# Altium PCB RP2040_WEDS.PcbDoc
Units mm, origin at the board's own origin, x right, y up, seen from the top; angles counter-clockwise.
Board outline 55 x 66 mm, 2 copper layers (F.Cu, B.Cu); 69 components, 40 nets, 258 pads, 71 vias.
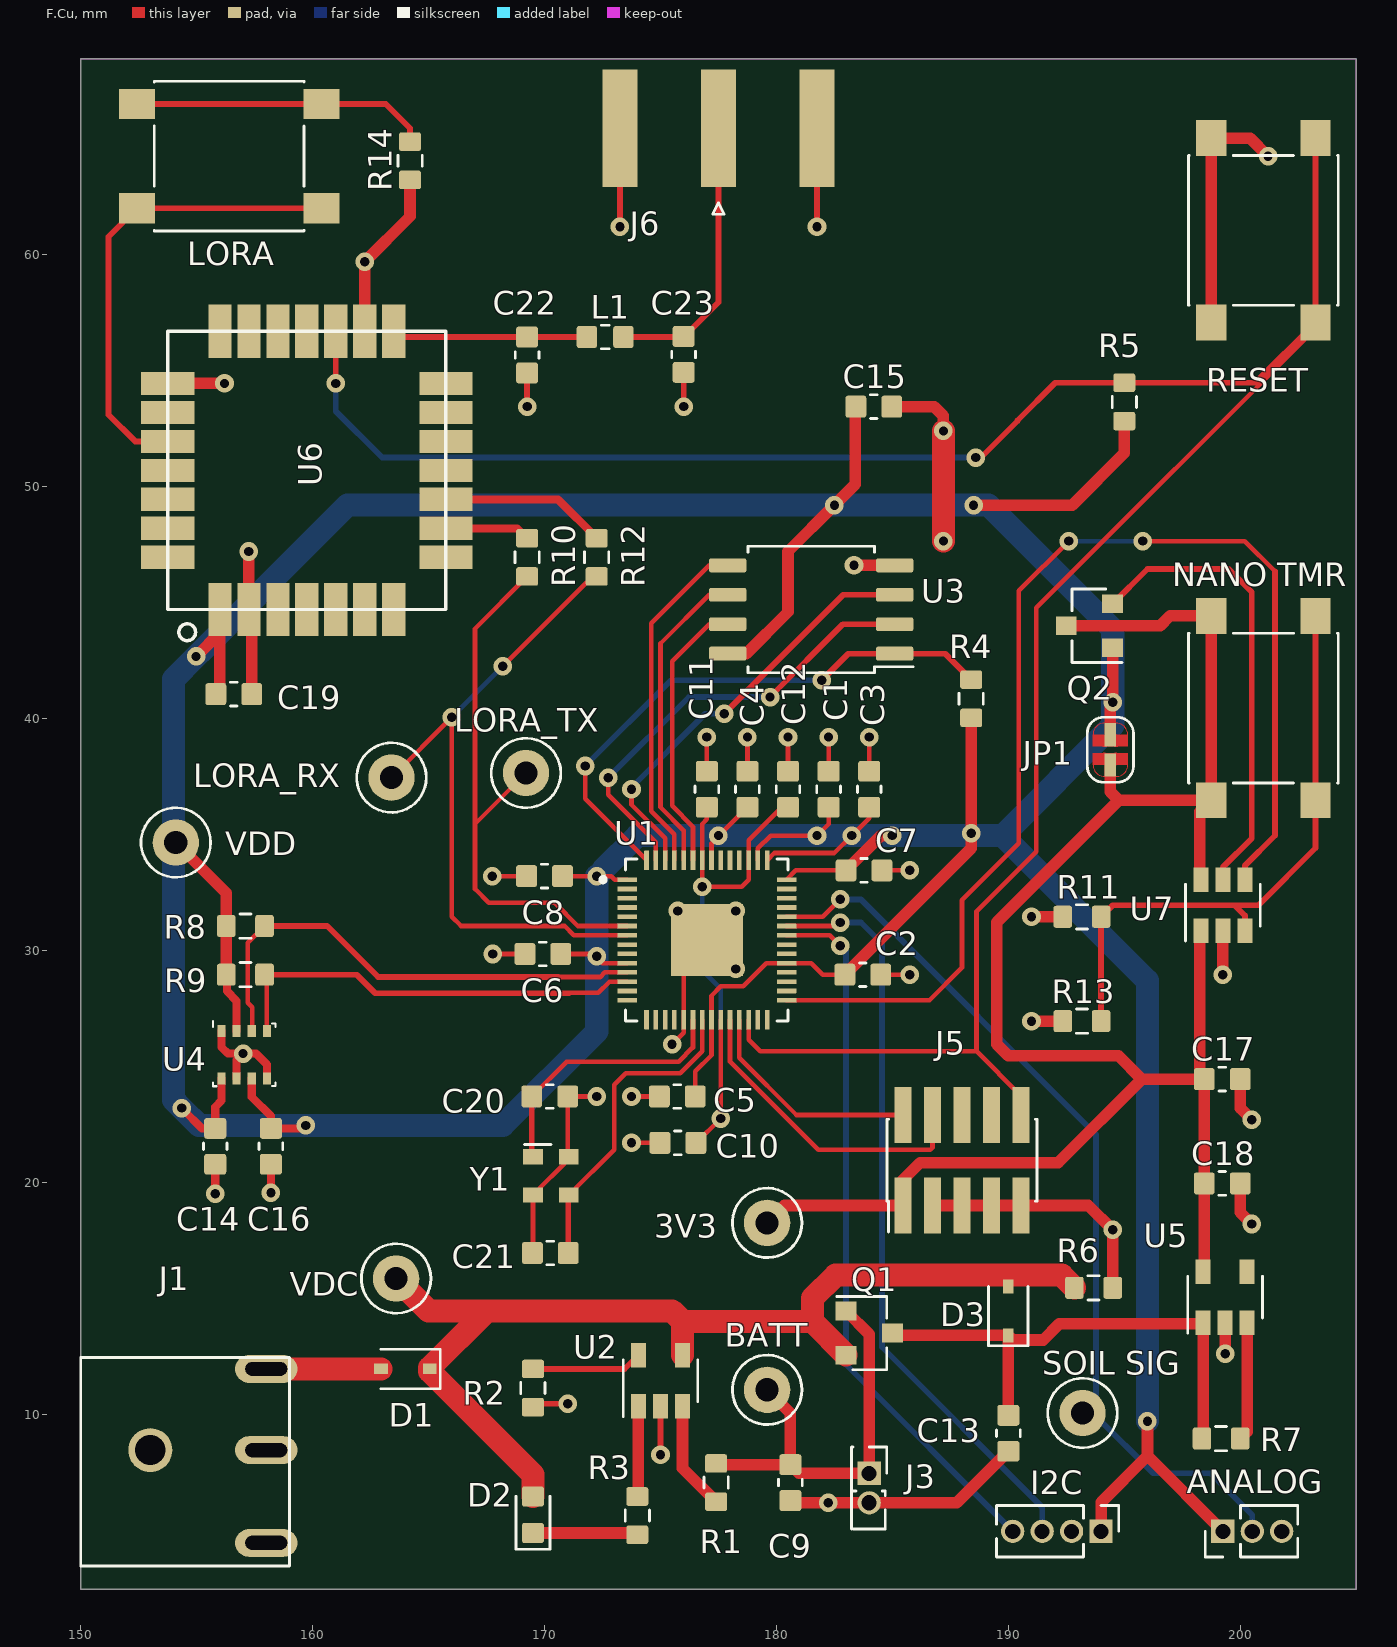
[diagram p0: F.Cu view]
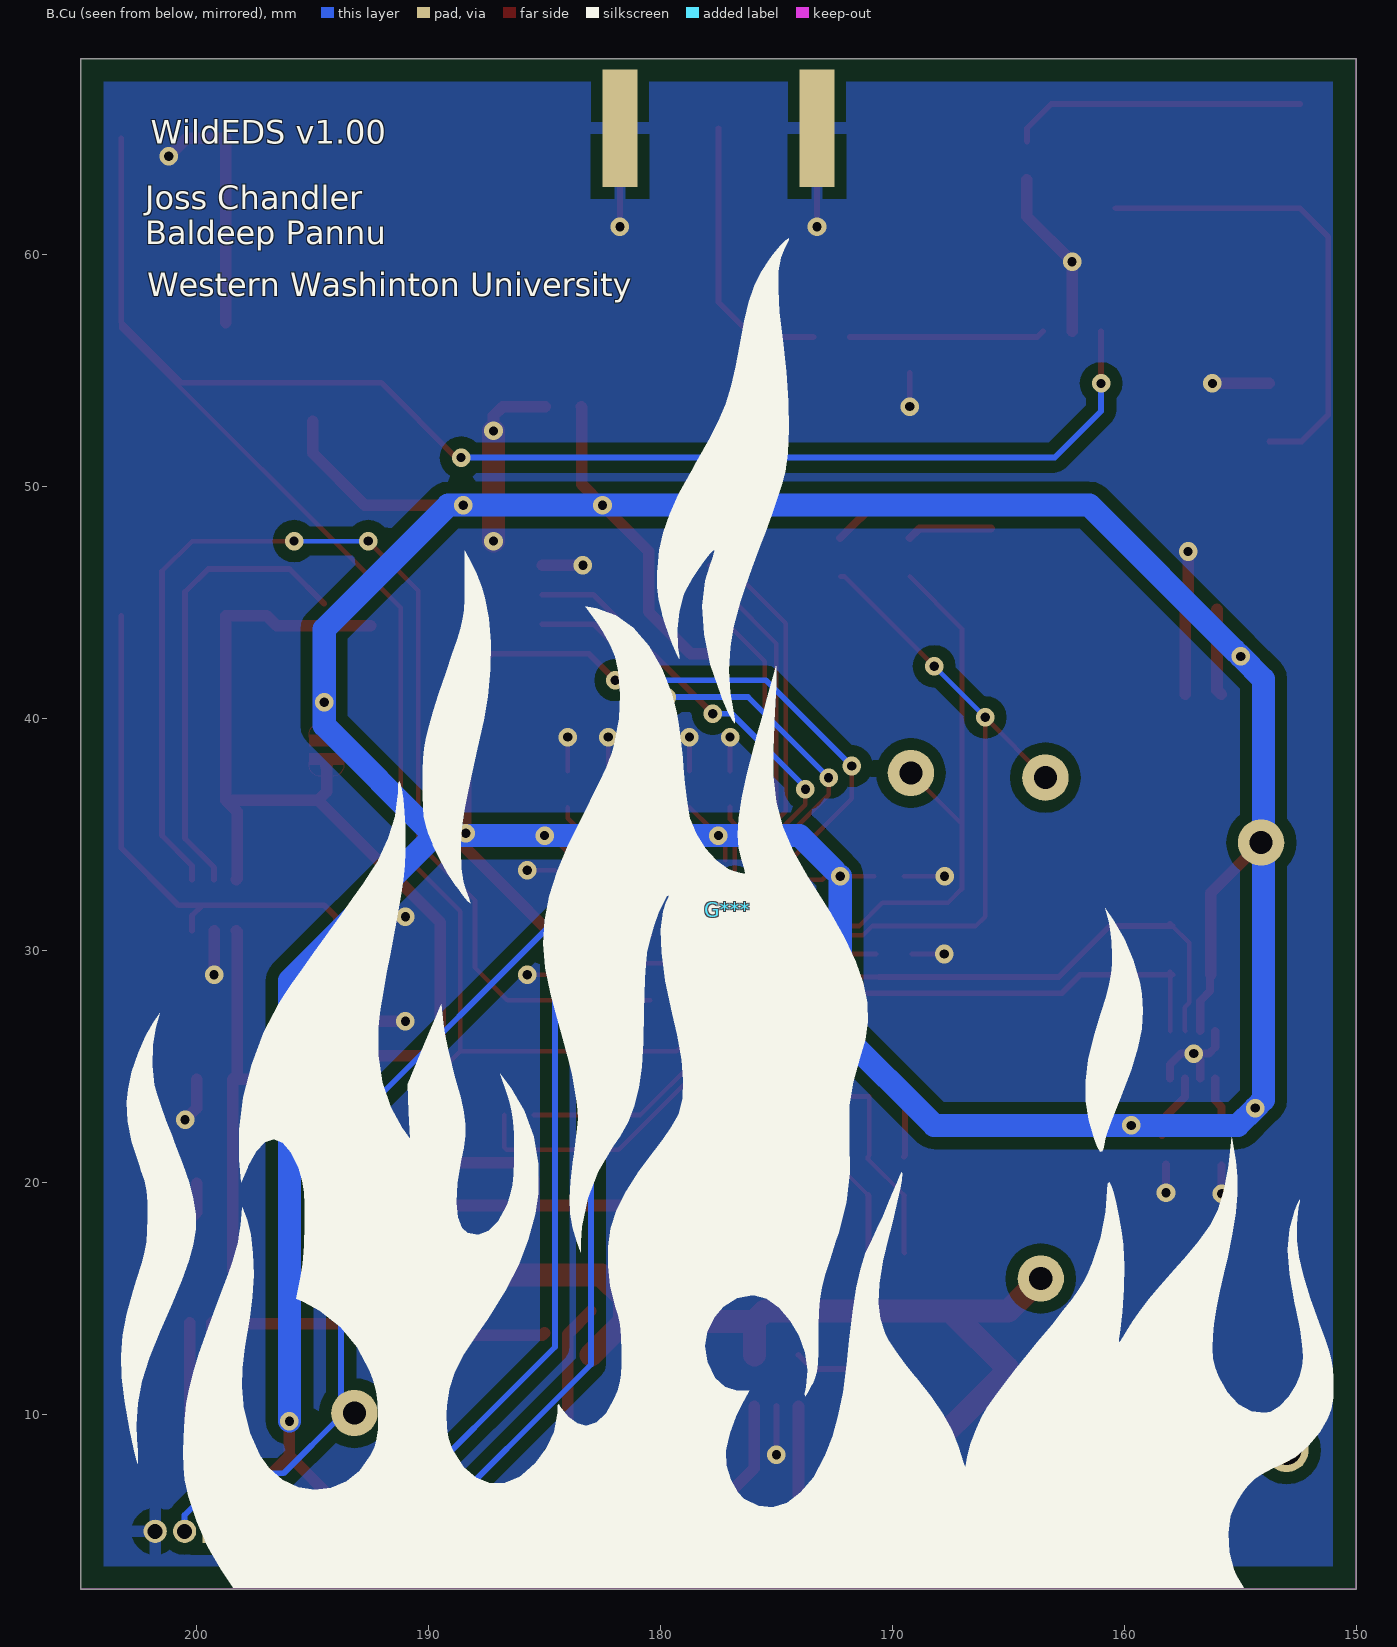
[diagram p1: B.Cu view, seen from below]

## Layer stack, top to bottom
F.Mask: solder mask 0.0102, Solder Resist, Dk 3.5
F.Cu: signal copper 0.0356
Dielectric 1: dielectric 0.32, FR-4, Dk 4.8
B.Cu: signal copper 0.0356
B.Mask: solder mask 0.0102, Solder Resist, Dk 3.5

## Board outline
205,68.45 205,2.45 150,2.45 150,68.45 205,68.45

## Design rules (kind name [scope] priority, off if disabled: settings)
Clearance "Clearence 0.508_Polygon" [InNamedPolygon('B.Cu-GND')] p1: gap=0.508 ignorepadtopadclearanceinfootprint=FALSE
Clearance "Clearence 0.2_NetClass" [InNetClass('Default')] p2: gap=0.2 ignorepadtopadclearanceinfootprint=FALSE
HoleSize "Hole Size (Default)" [All] p1: absolutevalues=TRUE maxlimit=10 minlimit=0.3 maxpercent=80.000 minpercent=20.000
MinimumSolderMaskSliver [All] p1: minsoldermaskwidth=0
PolygonConnect Polygon_B.Cu-GND_ConnectDirect [IsNamedPolygon('B.Cu-GND') vs IsVia] p1: connectstyle=Direct reliefconductorwidth=0.254 reliefentries=4 polygonreliefangle="90 Angle" airgapwidth=0.254
PolygonConnect Polygon_B.Cu-GND_ConnectRelief45 [IsNamedPolygon('B.Cu-GND') vs (IsThruPin or IsSMTPin) and (PadShape_AllLayers = 'Round')] p2: connectstyle=Relief reliefconductorwidth=0.508 reliefentries=4 polygonreliefangle="45 Angle" airgapwidth=0.508
PolygonConnect Polygon_B.Cu-GND_ConnectRelief90 [IsNamedPolygon('B.Cu-GND') vs (IsThruPin or IsSMTPin) and (PadShape_AllLayers <> 'Round')] p3: connectstyle=Relief reliefconductorwidth=0.508 reliefentries=4 polygonreliefangle="90 Angle" airgapwidth=0.508
RoutingVias [All] p1: holewidth=0.711 width=1.27 viastyle="Through Hole" minholewidth=0.711 minwidth=1.27 maxholewidth=0.711 maxwidth=1.27
SilkToSilkClearance [All] p1: silktosilkclearance=0
SilkToSolderMaskClearance [IsPad] p1: minsilkscreentomaskgap=0 clearancetoexposedcopper=TRUE
SolderMaskExpansion [All] p1: expansion=0.102 istentingtop=FALSE
Width [All] p1: maxlimit=10 minlimit=0.2 preferedwidth=0.25 minimp=50.000000 maximp=50.000000 favimp=50.000000
26 further rules are at their usual default settings.

## Classes and differential pairs
net class Default: +1V1 +3V3 +BATT DONE GND LORA_RX LORA_TX Net-(C13-Pad1) Net-(C22-Pad1) Net-(C23-Pad1) Net-(D1-Pad2) Net-(D2-Pad1) Net-(Q2-Pad2) Net-(R1-Pad2) Net-(R2-Pad2) Net-(R3-Pad2) Net-(R7-Pad1) Net-(R10-Pad1) Net-(R11-Pad2) Net-(R12-Pad1) Net-(R14-Pad2) Net-(SW3-Pad1) QSPI_CLK QSPI_CSN QSPI_SD0 QSPI_SD1 QSPI_SD2 QSPI_SD3 RESET SCL SCL_SOIL SDA SDA_SOIL SOIL_SIG SWD_CLK SWD_DIO VDC VDD XIN XOUT

## Components (designator, comment, footprint, x,y, rotation, side; value= is the part's Value field where it differs from the comment)
3V3 "TestPoint" TestPoint_Loop_D1.80mm_Drill1.0mm_Beaded 179.6,18.25 r0 top
ANALOG "Conn_01x03_Male" PinHeader_1x03_P1.27mm_Vertical 199.25,4.95 r90 top
BATT "TestPoint" TestPoint_Loop_D1.80mm_Drill1.0mm_Beaded 179.6,11.05 r0 top
C1 "1uF" C_0603_1608Metric 182.25,36.95 r90 top
C2 "100nF" C_0603_1608Metric 183.725,28.95 r0 top
C3 "100nF" C_0603_1608Metric 184,36.95 r90 top
C4 "100nF" C_0603_1608Metric 178.75,36.95 r90 top
C5 "100nF" C_0603_1608Metric 175.725,23.7 r180 top
C6 "100nF" C_0603_1608Metric 169.926,29.845 r180 top
C7 "100nF" C_0603_1608Metric 183.775,33.45 r0 top
C8 "100nF" C_0603_1608Metric 170,33.2 r180 top
C9 "10uF" C_0603_1608Metric 180.6,7.05 r270 top
C10 "100nF" C_0603_1608Metric 175.75,21.7 r180 top
C11 "100nF" C_0603_1608Metric 177,36.95 r90 top
C12 "1uF" C_0603_1608Metric 180.5,36.95 r90 top
C13 "10uF" C_0603_1608Metric 190,9.175 r270 top
C14 "100nF" C_0603_1608Metric 155.8,21.55 r270 top
C15 "C" C_0603_1608Metric 184.2,53.45 r0 top
C16 "100nF" C_0603_1608Metric 158.2,21.55 r270 top
C17 "10uF" C_0603_1608Metric 199.225,24.45 r0 top
C18 "10uF" C_0603_1608Metric 199.225,19.95 r0 top
C19 "4.7uF" C_0603_1608Metric 156.6,41.05 r0 top
C20 "8pF" C_0603_1608Metric 170.225,23.7 r0 top
C21 "8pF" C_0603_1608Metric 170.25,16.95 r0 top
C22 "DNP" C_0603_1608Metric 169.25,55.675 r270 top
C23 "DNP" C_0603_1608Metric 176,55.7 r270 top
D1 "D_Schottky" D_SOD-323 164,11.95 r180 top
D2 "LED" LED_0603_1608Metric 169.5,5.663 r90 top
D3 "D_Schottky" D_SOD-323 190,14.45 r90 top
G*** "LOGO" Flame_Logo 177.1,31.75 r0 bottom
I2C "Conn_01x04_Male" PinHeader_1x04_P1.27mm_Vertical 194,4.95 r270 top
J1 "Barrel_Jack_Switch_Pin3Ring" 54-00125 154,13.45 r0 top
J3 "LiPo Batt" PinHeader_2x01_P1.27mm_Vertical 184,7.45 r270 top
J5 "Conn_02x05_Odd_Even" PinHeader_2x05_P1.27mm_Vertical_SMD 188,20.95 r90 top
J6 "SMA-J-P-H-RA-TH1" SMA_Amphenol_132289_EdgeMount_new 177.5,65.45 r90 top
JP1 "SolderJumper_2_Open" SolderJumper-2_P1.3mm_Open_RoundedPad1.0x1.5mm 194.4,38.65 r90 top
L1 "0H" L_0603_1608Metric 172.612,56.45 r0 top
LORA "SW_Push" SW_Push_1P1T_NO_6x6mm_H9.5mm 156.4,64.25 r180 top
LORA_RX "TestPoint" TestPoint_Loop_D1.80mm_Drill1.0mm_Beaded 163.4,37.45 r0 top
LORA_TX "TestPoint" TestPoint_Loop_D1.80mm_Drill1.0mm_Beaded 169.2,37.65 r0 top
"NANO TMR" "SW_Push" SW_Push_1P1T_NO_6x6mm_H9.5mm 201,40.45 r270 top
Q1 "Q_PMOS_DGS" SOT-23 184,13.5 r0 top
Q2 "Q_PMOS_DGS" SOT-23 193.5,44 r180 top
R1 "0" R_0603_1608Metric 177.4,7.05 r270 top
R2 "2k" R_0603_1608Metric 169.5,11.125 r90 top
R3 "10k" R_0603_1608Metric 174,5.625 r90 top
R4 "10k" R_0603_1608Metric 188.4,40.85 r270 top
R5 "10k" R_0603_1608Metric 195,53.65 r90 top
R6 "10k" R_0603_1608Metric 193.675,15.45 r0 top
R7 "10k" R_0603_1608Metric 199.175,8.95 r180 top
R8 "10k" R_0603_1608Metric 157.1,31.05 r0 top
R9 "10k" R_0603_1608Metric 157.1,28.95 r0 top
R10 "22" R_0603_1608Metric 169.25,46.95 r270 top
R11 "221k" R_0603_1608Metric 193.175,31.45 r0 top
R12 "22" R_0603_1608Metric 172.25,46.95 r270 top
R13 "287k" R_0603_1608Metric 193.175,26.95 r0 top
R14 "470" R_0603_1608Metric 164.2,64.05 r90 top
RESET "SW_Push" SW_Push_1P1T_NO_6x6mm_H9.5mm 201,61.05 r270 top
"SOIL SIG" "TestPoint" TestPoint_Loop_D1.80mm_Drill1.0mm_Beaded 193.2,10.05 r0 top
U1 "RP2040" QFN40P700X700X90-57N 177,30.45 r0 top
U2 "MCP73831-2-OT" SOT-23-5 175,11.45 r90 top
U3 "W25Q128JVS" SOIC-8_5.23x5.23mm_P1.27mm 181.5,44.7 r180 top
U4 "BME280" Bosch_LGA-8_2.5x2.5mm_P0.65mm_ClockwisePinNumbering 157.05,25.5 r0 top
U5 "AP2112K-3.3" SOT-23-5 199.35,15.05 r90 top
U6 "LoRa-E5" LoRa-E5 159.75,50.7 r90 top
U7 "TPL5110" SOT-23-6 199.25,31.95 r90 top
VDC "TestPoint" TestPoint_Loop_D1.80mm_Drill1.0mm_Beaded 163.6,15.85 r0 top
VDD "TestPoint" TestPoint_Loop_D1.80mm_Drill1.0mm_Beaded 154.1,34.65 r0 top
Y1 "Crystal_GND24" Oscillator_SMD_Abracon_ASDMB-4Pin_2.5x2.0mm 170.275,20.275 r270 top

## Footprints (in the part's own frame and the unit in brackets; to place one, negate y for a bottom-side part, rotate by r counter-clockwise, add the part's x,y. Pads: shape width x height; smd on the part's side, far side on the other; paste and mask are expansions set on the pad)
54-00125 [mm]
  rrect100% 2.7x1.2 hole 0.6 slot 1.8 at 0 deg paste-2.7 mask+0.051: 1(4,-1.5) 2(4,-5) 3(4,-9)
  round 1.9 hole 1.3 paste-1.9 mask+0.051: Un1(-1,-5)
  silkscreen extent -4,-10 5,-1
Bosch_LGA-8_2.5x2.5mm_P0.65mm_ClockwisePinNumbering [mm]
  rect 0.35x0.5 smd mask+0.051: 1(-0.975,1.025) 2(-0.325,1.025) 3(0.325,1.025) 4(0.975,1.025) 5(0.975,-1.025) 6(0.325,-1.025) 7(-0.325,-1.025) 8(-0.975,-1.025)
  silkscreen extent -1.35,-1.36 1.35,1.45
C_0603_1608Metric [mm]
  rrect25% 0.9x0.95 smd mask+0.051: 1(-0.775,0) 2(0.775,0)
  silkscreen extent -0.14,-0.51 0.14,0.51
D_SOD-323 [mm]
  rect 0.6x0.45 smd mask+0.051: 1(-1.05,0) 2(1.05,0)
  silkscreen extent -1.5,-0.85 1.05,0.85
Flame_Logo [mm]
  silkscreen extent -26.12,-28.96 26.16,29.24
L_0603_1608Metric [mm]
  rrect25% 0.875x0.95 smd mask+0.051: 1(-0.787,0) 2(0.787,0)
  silkscreen extent -0.16,-0.51 0.16,0.51
LED_0603_1608Metric [mm]
  rrect25% 0.875x0.95 smd mask+0.051: 1(-0.787,0) 2(0.787,0)
  silkscreen extent -1.49,-0.73 0.8,0.73
LoRa-E5 [mm]
  rect 2.3x1 smd mask+0.051: 1(-6,3.75) 2(-6,2.5) 3(-6,1.25) 4(-6,0) 5(-6,-1.25) 6(-6,-2.5) 7(-6,-3.75) 15(6,-3.75) 16(6,-2.5) 17(6,-1.25) 18(6,0) 19(6,1.25) 20(6,2.5) 21(6,3.75)
  rect 1x2.3 smd mask+0.051: 8(-3.75,-6) 9(-2.5,-6) 10(-1.25,-6) 11(0,-6) 12(1.25,-6) 13(2.5,-6) 14(3.75,-6) 22(3.75,6) 23(2.5,6) 24(1.25,6) 25(0,6) 26(-1.25,6) 27(-2.5,6) 28(-3.75,6)
  silkscreen extent -7.34,-6 6,6
Oscillator_SMD_Abracon_ASDMB-4Pin_2.5x2.0mm [mm]
  rect 0.65x0.85 smd mask+0.051: 1(-0.825,-0.775) 2(0.825,-0.775) 3(0.825,0.775) 4(-0.825,0.775)
  silkscreen extent -1.35,-1.14 -1.35,0
PinHeader_1x03_P1.27mm_Vertical [mm]
  rect 1x1 hole 0.65 paste-1 mask+0.051: 1(0,0)
  rrect100% 1x1 hole 0.65 paste-1 mask+0.051: 2(0,-1.27) 3(0,-2.54)
  silkscreen extent -1.11,-3.23 1.11,0.76
PinHeader_1x04_P1.27mm_Vertical [mm]
  rect 1x1 hole 0.65 paste-1 mask+0.051: 1(0,0)
  rrect100% 1x1 hole 0.65 paste-1 mask+0.051: 2(0,-1.27) 3(0,-2.54) 4(0,-3.81)
  silkscreen extent -1.11,-4.5 1.11,0.76
PinHeader_2x01_P1.27mm_Vertical [mm]
  rect 1x1 hole 0.65 paste-1 mask+0.051: 1(0,0)
  rrect100% 1x1 hole 0.65 paste-1 mask+0.051: 2(1.27,0)
  silkscreen extent -1.13,-0.76 2.4,0.76
PinHeader_2x05_P1.27mm_Vertical_SMD [mm]
  rect 2.4x0.74 smd mask+0.051: 1(-1.95,2.54) 2(1.95,2.54) 3(-1.95,1.27) 4(1.95,1.27) 5(-1.95,0) 6(1.95,0) 7(-1.95,-1.27) 8(1.95,-1.27) 9(-1.95,-2.54) 10(1.95,-2.54)
  silkscreen extent -3.09,-3.23 1.77,3.23
QFN40P700X700X90-57N [mm]
  rrect3% 0.84x0.2 smd mask+0.051: 1(-3.435,2.6) 2(-3.435,2.2) 3(-3.435,1.8) 4(-3.435,1.4) 5(-3.435,1) 6(-3.435,0.6) 7(-3.435,0.2) 8(-3.435,-0.2) 9(-3.435,-0.6) 10(-3.435,-1) 11(-3.435,-1.4) 12(-3.435,-1.8) 13(-3.435,-2.2) 14(-3.435,-2.6) 29(3.435,-2.6) 30(3.435,-2.2) 31(3.435,-1.8) 32(3.435,-1.4) 33(3.435,-1) 34(3.435,-0.6) 35(3.435,-0.2) 36(3.435,0.2) 37(3.435,0.6) 38(3.435,1) 39(3.435,1.4) 40(3.435,1.8) 41(3.435,2.2) 42(3.435,2.6)
  rrect10% 0.2x0.84 smd mask+0.051: 15(-2.6,-3.435) 16(-2.2,-3.435) 17(-1.8,-3.435) 18(-1.4,-3.435) 19(-1,-3.435) 20(-0.6,-3.435) 21(-0.2,-3.435) 22(0.2,-3.435) 23(0.6,-3.435) 24(1,-3.435) 25(1.4,-3.435) 26(1.8,-3.435) 27(2.2,-3.435) 28(2.6,-3.435) 43(2.6,3.435) 44(2.2,3.435) 45(1.8,3.435) 46(1.4,3.435) 47(1,3.435) 48(0.6,3.435) 49(0.2,3.435) 50(-0.2,3.435) 51(-0.6,3.435) 52(-1,3.435) 53(-1.4,3.435) 54(-1.8,3.435) 55(-2.2,3.435) 56(-2.6,3.435)
  rect 3.1x3.1 smd paste-3.1 mask+0.051: 57(0,0)
  silkscreen extent -4.57,-3.5 3.5,3.5
R_0603_1608Metric [mm]
  rrect25% 0.8x0.95 smd mask+0.051: 1(-0.825,0) 2(0.825,0)
  silkscreen extent -0.24,-0.52 0.24,0.52
SMA_Amphenol_132289_EdgeMount_new [mm]
  rect 5.08x1.5 smd mask+0.051: 1(0,0) 2(0,-4.25) 3(0,4.25)
  rect 5.08x1.5 smd far side mask+0.051: 4(0,4.25) 5(0,-4.25)
  silkscreen extent -3.71,-0.25 -3.21,0.25
SOIC-8_5.23x5.23mm_P1.27mm [mm]
  rrect25% 1.6x0.6 smd mask+0.051: 1(-3.6,1.905) 2(-3.6,0.635) 3(-3.6,-0.635) 4(-3.6,-1.905) 5(3.6,-1.905) 6(3.6,-0.635) 7(3.6,0.635) 8(3.6,1.905)
  silkscreen extent -4.4,-2.73 2.73,2.73
SolderJumper-2_P1.3mm_Open_RoundedPad1.0x1.5mm [mm]
  rect 1x0.5 smd paste-1 mask+0.051: 1(-0.65,0) 2(0.65,0)
  F.Cu circle w0: c-0.65,0.25 r0.5
  F.Cu circle w0: c-0.65,-0.25 r0.5
  F.Cu region: -0.15,-0.75 -0.65,-0.75 -0.65,0.75 -0.15,0.75
  F.Cu region: 0.65,-0.75 0.15,-0.75 0.15,0.75 0.65,0.75
  F.Cu lines w0: 0.217,0 ccw(c0.65,-0.25) 0.65,-0.75 ccw(c0.65,-0.25) 1.083,0 ; 0.217,0 cw(c0.65,-0.25) 1.083,0 ; 0.217,0 ccw(c0.65,0.25) 0.65,-0.25 ccw(c0.65,0.25) 1.083,0 ; 0.217,0 cw(c0.65,0.25) 1.083,0
  silkscreen extent -1.4,-1 1.4,1
SOT-23 [mm]
  rect 0.9x0.8 smd mask+0.051: 1(-1,0.95) 2(-1,-0.95) 3(1,0)
  silkscreen extent -1.4,-1.58 0.76,1.58
SOT-23-5 [mm]
  rect 1.06x0.65 smd mask+0.051: 1(-1.1,0.95) 2(-1.1,0) 3(-1.1,-0.95) 4(1.1,-0.95) 5(1.1,0.95)
  silkscreen extent -1.55,-1.61 0.9,1.61
SOT-23-6 [mm]
  rect 1.06x0.65 smd mask+0.051: 1(-1.1,0.95) 2(-1.1,0) 3(-1.1,-0.95) 4(1.1,-0.95) 5(1.1,0) 6(1.1,0.95)
  silkscreen extent -1.55,-1.61 0.9,1.61
SW_Push_1P1T_NO_6x6mm_H9.5mm [mm]
  rect 1.55x1.3 smd mask+0.051: 1(-3.975,2.25) 1(3.975,2.25) 2(-3.975,-2.25) 2(3.975,-2.25)
  silkscreen extent -3.23,-3.23 3.23,3.23
TestPoint_Loop_D1.80mm_Drill1.0mm_Beaded [mm]
  round 2 hole 1 paste-2 mask+0.051: 1(0,0)
  silkscreen extent -1.5,-1.5 1.5,1.5

## Part data
3V3 BATT LORA_RX LORA_TX "SOIL SIG" VDC VDD: library part TestPoint_Loop_D1.80mm_Drill1.0mm_Beaded, "wire loop with bead as test point, loop diameter 1.8mm, hole diameter 1.0mm"
ANALOG: library part PinHeader_1x03_P1.27mm_Vertical, "Through hole straight pin header, 1x03, 1.27mm pitch, single row"
C1 C2 C3 C4 C5 C6 C7 C8 C9 C10 C11 C12 C13 C14 C15 C16 C17 C18 C19 C20 C21 C22 C23: library part C_0603_1608Metric, "Capacitor SMD 0603 (1608 Metric), square (rectangular) end terminal, IPC_7351 nominal, (Body size source: IPC-SM-782 page 76, https://www.pcb-3d.com/wordpress/wp-content/uploads/ipc-sm-782a_amendment_1_and_2.pdf), generated with kicad-footprint-generator"
D1 D3: library part D_SOD-323, "SOD-323"
D2: library part LED_0603_1608Metric, "LED SMD 0603 (1608 Metric), square (rectangular) end terminal, IPC_7351 nominal, (Body size source: http://www.tortai-tech.com/upload/download/2011102023233369053.pdf), generated with kicad-footprint-generator"
G***: library part Flame_Logo
I2C: library part PinHeader_1x04_P1.27mm_Vertical, "Through hole straight pin header, 1x04, 1.27mm pitch, single row"
J1: library part 54-00125
J3: library part PinHeader_2x01_P1.27mm_Vertical, "Through hole straight pin header, 2x01, 1.27mm pitch, double rows"
J5: library part PinHeader_2x05_P1.27mm_Vertical_SMD, "surface-mounted straight pin header, 2x05, 1.27mm pitch, double rows"
J6: library part SMA_Amphenol_132289_EdgeMount_new, "http://www.amphenolrf.com/132289.html"
JP1: library part SolderJumper-2_P1.3mm_Open_RoundedPad1.0x1.5mm, "SMD Solder Jumper, 1x1.5mm, rounded Pads, 0.3mm gap, open"
L1: library part L_0603_1608Metric, "Inductor SMD 0603 (1608 Metric), square (rectangular) end terminal, IPC_7351 nominal, (Body size source: http://www.tortai-tech.com/upload/download/2011102023233369053.pdf), generated with kicad-footprint-generator"
LORA "NANO TMR" RESET: library part SW_Push_1P1T_NO_6x6mm_H9.5mm, "tactile push button, 6x6mm e.g. PTS645xx series, height=9.5mm"
Q1 Q2: library part SOT-23, "SOT-23, Standard"
R1 R2 R3 R4 R5 R6 R7 R8 R9 R10 R11 R12 R13 R14: library part R_0603_1608Metric, "Resistor SMD 0603 (1608 Metric), square (rectangular) end terminal, IPC_7351 nominal, (Body size source: IPC-SM-782 page 72, https://www.pcb-3d.com/wordpress/wp-content/uploads/ipc-sm-782a_amendment_1_and_2.pdf), generated with kicad-footprint-generator"
U1: library part QFN40P700X700X90-57N
U2 U5: library part SOT-23-5, "5-pin SOT23 package"
U3: library part SOIC-8_5.23x5.23mm_P1.27mm, "SOIC, 8 Pin (http://www.winbond.com/resource-files/w25q32jv%20revg%2003272018%20plus.pdf#page=68), generated with kicad-footprint-generator ipc_gullwing_generator.py"
U4: library part Bosch_LGA-8_2.5x2.5mm_P0.65mm_ClockwisePinNumbering, "LGA-8"
U7: library part SOT-23-6, "6-pin SOT-23 package"
Y1: library part Oscillator_SMD_Abracon_ASDMB-4Pin_2.5x2.0mm, "Miniature Crystal Clock Oscillator Abracon ASDMB series, 2.5x2.0mm package, http://www.abracon.com/Oscillators/ASDMB.pdf"

## Via types
v1: diameter 0.8, hole 0.4, F.Cu to B.Cu, tented both sides, 71 vias

## Nets (pads, with @x,y where several pads share a name; then routed paths per layer and width w, separated by ;. In a path a pad name is that pad's centre, name@x,y a point inside that pad or via, vN(x,y) a via of type N, cw(c..) or ccw(c..) an arc to the next point about the centre after c; other vN are vias at no path point)
+1V1: C10.1 C11.1 C12.1 U1.23 U1.45 U1.50 | length 25.7
  F.Cu w0.2: C10.1@176.55,21.7 v1(177.6,22.75) U1.23 ; C11.1@177,36.2 177,35.65 176.8,35.45 U1.50 v1(176.8,32.75) 178.5,32.75 178.8,33.05 U1.45 178.8,34.75 180.225,36.175 C12.1
  B.Cu w0.2: v1(176.8,32.75) 176.8,32.65 176.8,32.55 176.8,29.15 177.6,28.35 v1(177.6,22.75)
+3V3: 3V3.1 "NANO TMR.2" C17.1 C18.1 J5.1 JP1.1 Q2.3 U5.5 U7.1 U7.6 | length 80.2
  F.Cu w0.5: 3V3.1 180.35,19 J5.1 185.46,20.11 186.2,20.85 192.15,20.85 195.75,24.45 ; Q2.3 196.55,44 196.975,44.425 198.75,44.425 198.75,36.475 ; JP1.1 194.4,36.842 194.767,36.475 ; U7.1 198.25,30.8 198.25,24.65 C17.1 ; U7.6 198.25,33.1 198.25,35.975 198.75,36.475 ; U5.5 198.45,16.2 C18.1 C17.1 ; 194.767,36.475 189.5,31.208 189.5,25.95 190,25.45 194.75,25.45 195.75,24.45 ; 194.767,36.475 198.75,36.475 ; 195.75,24.45 C17.1
+BATT: BATT.1 C9.1 J3.1 Q1.1 R1.1 | length 17.8
  F.Cu w0.5: R1.1 177.45,7.825 C9.1 ; BATT.1 180.6,10.05 C9.1 ; Q1.1 184,13.45 J3.1 180.975,7.45 C9.1
DONE: U1.29 U7.4 | length 51.7
  F.Cu w0.2: U1.29 186.6,27.85 188,29.25 188,32.164 190.45,34.614 190.45,38 190.45,45.5 v1(192.6,47.65) ; v1(195.8,47.65) 200.2,47.65 201.5,46.35
  F.Cu w0.25: U7.4 200.2,33.65 201.5,34.95 201.5,46.35
  B.Cu w0.2: v1(192.6,47.65) v1(195.8,47.65)
GND: ANALOG.3 C1.2 C2.2 C3.2 C4.2 C5.2 C6.2 C7.2 C8.2 C9.2 C10.2 C11.2 C12.2 C13.2 C14.2 C15.2 C16.2 C17.2 C18.2 C19.2 C20.2 C21.1 C22.2 C23.2 I2C.2 J1.2 J1.3 J3.2 J5.3 J5.5 J5.7 J5.9 J6.2 J6.3 J6.4 J6.5 R2.1 R6.2 R11.1 R13.1 R14.1 RESET.2 U1.19 U1.57 U2.2 U3.4 U4.1 U4.5 U4.7 U5.2 U6.2 U6.16 U6.22 U7.2 Y1.2 Y1.4 | length 118
  F.Cu w0.2: v1(167.767,29.845) C6.2 ; v1@168,33.2 C8.2 C8.2@169.5,33.2 ; C21.1 169.5,16.975 Y1.2 ; Y1.2@169.475,19.425 Y1.2 ; v1(172.25,23.7) C20.2 171,21.15 Y1.4 171.05,21 Y1.2 ; v1(173.75,21.7) C10.2 ; v1(173.75,23.7) C5.2 ; v1(175.5,25.95) 176,26.45 176,29.45 U1.57 ; C11.2 v1(177,39.2) ; C4.2 v1(178.75,39.2) ; C12.2 v1(180.5,39.2) ; C1.2 v1(182.25,39.2) ; C3.2 v1(184,39.2) ; C2.2 v1(185.75,28.95) ; C7.2 v1(185.75,33.45)
  F.Cu w0.25: v1(169.25,53.45) C22.2 ; R2.1 169.65,10.45 v1(171,10.45) ; v1(173.25,61.2) J6.3 ; v1@175,8.45 U2.2 ; v1(176,53.45) C23.2 ; v1(181.75,61.2) J6.2
  F.Cu w0.35: v1@155.8,19.75 C14.2@155.8,20.725 ; U4.1 156.075,25.825 156.35,25.55 v1(157,25.55) ; U4.7 156.725,25.275 v1(157,25.55) ; U4.5 158.025,25.075 157.55,25.55 v1(157,25.55) ; v1(158.2,19.55) C16.2
  F.Cu w0.5: U6.22 v1(156.2,54.45) ; v1(157.25,47.2) U6.2 157.375,44.575 C19.2 ; U6.16 v1(162.25,59.7) 164.2,61.65 R14.1 ; C9.2 180.695,6.18 v1(182.23,6.18) J3.2 187.78,6.18 C13.2 ; v1(183.345,46.605) U3.4 ; C15.2 186.8,53.45 187.2,53.05 v1(187.2,52.4) ; J5.3 J5.5 J5.7 J5.9 193.45,19 v1(194.5,17.95) R6.2 ; v1(191,26.95) R13.1 ; v1(191,31.45) R11.1 ; RESET.2@198.75,57.075 198.75,65.025 200.425,65.025 v1(201.2,64.25) ; v1(199.25,28.95) U7.2 ; v1(199.35,12.6) U5.2 ; C18.2 200,18.7 v1(200.5,18.2) ; C17.2 200,23.2 v1(200.5,22.7)
  F.Cu w1: v1(187.2,47.65) v1(187.2,52.4)
  other v1: 175,8.25 155.8,19.5 178.25,29.2 175.75,31.7 178.25,31.7 167.75,33.2
LORA_RX: LORA_RX.1 R12.2 U1.7 | length 29.1
  F.Cu w0.2: LORA_RX.1 v1(166,40.05) ; v1@166,40.25 v1(166,40.05) ; v1(168.2,42.25) 172.075,46.125 R12.2 ; U1.7 171.267,30.65 170.867,31.05 166.4,31.05 166,31.45 166,32.65 v1(166,40.05)
  B.Cu w0.2: v1(166,40.05) v1(168.2,42.25)
LORA_TX: LORA_TX.1 R10.2 U1.6 | length 25.3
  F.Cu w0.2: LORA_TX.1 167,35.45 167,34.85 ; R10.2 167,43.875 167,35.65 167,34.85 ; U1.6 171.433,31.05 170.433,32.05 167.6,32.05 167,32.65 167,34.85
Net-(C13-Pad1): C13.1 D3.1 Q1.3 R7.2 U5.1 | length 22.3
  F.Cu w0.5: Q1.3 185.1,13.4 D3.1 ; C13.1 D3.1 ; R7.2 198.4,9 U5.1 198.35,13.9 192.2,13.9 191.5,13.2 190.2,13.2 D3.1
Net-(C22-Pad1): C22.1 L1.1 U6.15 | length 8.4
  F.Cu w0.25: U6.15 163.75,56.45 L1.1
Net-(C23-Pad1): C23.1 J6.1 L1.2 | length 12.2
  F.Cu w0.25: L1.2 175.975,56.45 C23.1 176.025,56.475 177.5,57.95 J6.1
Net-(D1-Pad2): D1.2 J1.1 | length 5
  F.Cu w1: J1.1 D1.2
Net-(D2-Pad1): D2.1 R3.1 | length 4.5
  F.Cu w0.25: R3.1@173.925,4.875 R3.1
  F.Cu w0.5: D2.1 R3.1@173.925,4.875
Net-(Q2-Pad2): Q2.2 U7.5 | length 20
  F.Cu w0.25: Q2.2 196,46.45 199.5,46.45 200.5,45.45 200.5,34.83 199.25,33.58 U7.5
Net-(R1-Pad2): R1.2 U2.3 | length 4.7
  F.Cu w0.5: U2.3 175.95,7.675 R1.2
Net-(R2-Pad2): R2.2 U2.5 | length 4.8
  F.Cu w0.25: R2.2 173.45,11.95 U2.5
Net-(R3-Pad2): R3.2 U2.1 | length 3.9
  F.Cu w0.25: R3.2 R3.2@174.05,6.5
  F.Cu w0.5: R3.2@174.05,6.5 U2.1
Net-(R7-Pad1): R7.1 U5.3 | length 5.1
  F.Cu w0.5: R7.1 200.3,9.25 U5.3
Net-(R10-Pad1): R10.1 U6.9 | length 3.7
  F.Cu w0.35: U6.9 168.825,48.2 R10.1
Net-(R11-Pad2): "NANO TMR.1" R11.2 R13.2 U7.3 | length 26.7
  F.Cu w0.25: R13.2 194,30.95 R11.2 194.5,31.95 200.13,31.95 ; U7.3 200.2,31.5 199.75,31.95 200.13,31.95 ; 203.25,44.425 203.25,36.475 203.25,34.41 200.79,31.95 200.13,31.95
Net-(R12-Pad1): R12.1 U6.10 | length 7.2
  F.Cu w0.35: U6.10 170.575,49.45 R12.1
Net-(R14-Pad2): LORA.2 R14.2 | length 12.8
  F.Cu w0.25: LORA.2@152.425,66.5 160.375,66.5 163.15,66.5 164.2,65.45 R14.2
Net-(SW3-Pad1): LORA.1 U6.24 | length 20.4
  F.Cu w0.25: U6.24 152.35,51.95 151.2,53.1 151.2,60.775 152.425,62 LORA.1@160.375,62
QSPI_CLK: U1.52 U3.6 | length 13.5
  F.Cu w0.2: U1.52 176,35.167 175,36.167 175,43.235 177.1,45.335 U3.6
QSPI_CSN: R4.1 U1.56 U3.1 | length 24.3
  F.Cu w0.2: v1(171.75,37.95) 171.75,36.535 U1.56
  F.Cu w0.25: v1(181.95,41.65) 183.095,42.795 U3.1 187.28,42.795 R4.1
  B.Cu w0.25: v1(171.75,37.95) 175.45,41.65 v1(181.95,41.65)
QSPI_SD0: U1.53 U3.5 | length 15
  F.Cu w0.2: U1.53 175.6,35.001 174.6,36.001 174.6,44.105 177.1,46.605 U3.5
QSPI_SD1: U1.55 U3.2 | length 19.5
  F.Cu w0.2: v1(172.75,37.45) 172.75,36.72 174.8,34.67 U1.55
  F.Cu w0.25: v1(179.725,40.925) 182.865,44.065 U3.2
  B.Cu w0.25: v1(172.75,37.45) 176.225,40.925 179.475,40.925 v1(179.725,40.925)
QSPI_SD2: U1.54 U3.3 | length 18.5
  F.Cu w0.2: v1(173.75,36.95) 173.75,36.286 175.2,34.836 U1.54
  F.Cu w0.25: v1(177.75,40.2) 182.885,45.335 U3.3
  B.Cu w0.25: v1(173.75,36.95) 173.75,37.023 176.927,40.2 v1(177.75,40.2)
QSPI_SD3: U1.51 U3.7 | length 12
  F.Cu w0.2: U1.51 176.4,35.333 175.5,36.233 175.5,42.465 177.1,44.065 U3.7
RESET: J5.10 R5.2 RESET.1 U1.26 U6.17 | length 109.7
  F.Cu w0.2: U1.26 178.8,26.15 179.3,25.65 188.63,25.65 ; J5.10 190.54,23.74 188.63,25.65 ; RESET.1@203.25,57.075 203.25,56.819 191.2,44.769 191.2,34.25 188.63,31.68 188.63,25.65
  F.Cu w0.25: v1(161,54.45) U6.17 ; v1(188.6,51.25) 188.825,51.25 190.4,52.825 190.4,52.85 192.025,54.475 R5.2 200.65,54.475 203.25,57.075 RESET.1@203.25,65.025 ; J5.10 J5.10@190.54,23.73
  B.Cu w0.25: v1(161,54.45) 161,53.25 163,51.25 v1(188.6,51.25)
SCL: R9.2 U1.12 U4.4 | length 18.8
  F.Cu w0.2: R9.2 158.025,28.85 U4.4 ; 171.033,28.167 172.317,28.167 172.8,28.65 U1.12
  F.Cu w0.25: R9.2@158.025,29.05 R9.2 161.9,28.95 162.701,28.149 170.899,28.149 171.051,28.149
SCL_SOIL: I2C.3 U1.37 | length 32.8
  F.Cu w0.2: U1.37 182.6,31.05 v1(182.75,31.2)
  B.Cu w0.25: v1(182.75,31.2) 183.65,31.2 184.55,30.3 184.55,12.9 191.46,5.99 I2C.3
SDA: R8.2 U1.11 U4.3 | length 21.7
  F.Cu w0.2: U4.3 157.4,26.55 157.4,27.55 157.2,27.75 157.2,30.325 R8.2 ; 170.6,28.85 172.4,28.85 172.6,29.05 U1.11
  F.Cu w0.25: R8.2@158.025,31.15 R8.2 160.625,31.05 162.825,28.85 170.6,28.85
SDA_SOIL: I2C.4 U1.36 | length 30.8
  F.Cu w0.2: U1.36 182.3,30.65 v1(182.75,30.2)
  B.Cu w0.25: v1(182.75,30.2) 183,29.95 183,12.14 I2C.4
SOIL_SIG: "SOIL SIG.1" ANALOG.2 U1.38 | length 39.2
  F.Cu w0.2: U1.38 182,31.45 v1(182.75,32.2)
  B.Cu w0.25: v1(182.75,32.2) 183.636,32.2 193.775,22.061 193.775,9.925 196.25,7.45 198.727,7.45 200.52,5.657 ANALOG.2
SWD_CLK: J5.4 U1.24 | length 13.6
  F.Cu w0.2: U1.24 178,25.2 181.8,21.4 186.63,21.4 186.73,21.5 J5.4
SWD_DIO: J5.2 U1.25 | length 9.7
  F.Cu w0.2: U1.25 178.4,25.366 180.866,22.9 181.866,22.9 J5.2
VDC: D1.1 D2.2 D3.2 Q1.2 R6.1 U2.4 VDC.1 | length 46
  F.Cu w1: VDC.1 165,14.45 167.5,14.45 ; D2.2 169.5,7.4 165.05,11.85 D1.1 165.05,12 167.5,14.45 ; U2.4 175.95,14 ; Q1.2 181.55,14 ; R6.1 192.3,16 182.55,16 181.55,15 181.55,14 ; 167.5,14.45 175.5,14.45 175.95,14 ; 175.95,14 180.05,14 181.55,14
VDD: ANALOG.1 C1.1 C2.1 C3.1 C4.1 C5.1 C6.1 C7.1 C8.1 C14.1 C15.1 C16.1 C19.1 I2C.1 JP1.2 Q2.1 R4.2 R5.1 R8.1 R9.1 U1.1 U1.10 U1.22 U1.33 U1.42 U1.43 U1.44 U1.49 U3.8 U4.2 U4.6 U4.8 U6.1 VDD.1 | length 255.7
  F.Cu w0.2: C6.1 172.105,29.845 172.225,29.725 172.5,29.45 U1.10 ; C8.1 v1(172.25,33.2) 172.874,33.2 173.024,33.05 U1.1 ; C5.1 176.5,24.783 177.2,25.483 177.2,28.05 177.6,28.45 178.564,28.45 179.564,29.45 U1.33 181.5,29.45 182,28.95 C2.1 ; U1.49 177.2,34.625 177.512,34.938 177.775,35.2 C4.1 ; U1.44 179.2,34.4 179.75,34.95 v1(181.75,34.95) 182.25,35.45 C1.1 ; U1.43 179.915,34.2 182.5,34.2 v1(183.25,34.95) 184,35.7 C3.1 ; U1.42 180.835,33.45 C7.1
  F.Cu w0.35: v1@154.4,23.15 155.225,22.325 C14.1 155.8,23.25 156.075,23.525 U4.8 ; R9.1 156.3,28.925 156.3,28.25 156.725,27.825 U4.2 ; U4.6 157.375,23.675 158.2,22.85 C16.1 159.575,22.325 v1(159.7,22.45) ; C16.1@158.1,22.325 158.15,22.275 C16.1@158.375,22.05
  F.Cu w0.5: VDD.1 156.275,32.475 R8.1 R9.1 ; v1(154.975,42.675) U6.1@156,43.7 ; C19.1 156,41.225 U6.1@156,43.7 ; U6.1 U6.1@156,43.7 ; U3.8 178.7,42.795 180.5,44.595 180.5,47.2 v1(182.5,49.2) 183.4,50.1 183.4,53.425 C15.1 ; C2.1 188.4,34.4 v1(188.4,35.05) R4.2 ; C7.1 184.5,34.95 v1(185,34.95) ; v1(188.5,49.2) 192.75,49.2 195,51.45 R5.1 ; I2C.1 194,6.2 196,8.2 ; JP1.2 194.4,39.733 194.4,40.6 v1(194.5,40.7) Q2.1 ; v1(196,9.7) 196,8.2 ; ANALOG.1 196,8.2
  B.Cu w1: v1(172.25,33.2) v1(172.25,29.75) 172.25,29.45 172.25,26.5 168.2,22.45 v1(159.7,22.45) 155.1,22.45 v1(154.35,23.2) 154,23.55 154,41.7 v1(154.975,42.675) 155.25,42.95 161.5,49.2 v1(182.5,49.2) v1(188.5,49.2) 189.15,49.2 194.5,43.85 v1(194.5,40.7) 194.5,39.7 189.75,34.95 ; v1@172.5,33.45 174,34.95 v1(177.5,34.95) v1(181.75,34.95) v1(183.25,34.95) v1(185,34.95) 189.75,34.95 ; v1(196,9.7) 196,28.7 189.75,34.95
XIN: C20.1 U1.20 Y1.1 | length 11.8
  F.Cu w0.2: C20.1 170.95,25.2 175.786,25.2 176.4,25.814 U1.20 ; C20.1@169.7,23.7 C20.1@169.7,23.9
  F.Cu w0.25: C20.1 169.45,21.15 Y1.1
XOUT: C21.2 U1.21 Y1.3 | length 13.8
  F.Cu w0.2: Y1.3 173,21.4 173,24.2 173.5,24.7 175.852,24.7 176.8,25.648 U1.21
  F.Cu w0.25: C21.2 171.025,19.425 Y1.3
pads on no net: J1.Un1 J5.6 J5.8 U1.2 U1.3 U1.4 U1.5 U1.8 U1.9 U1.13 U1.14 U1.15 U1.16 U1.17 U1.18 U1.27 U1.28 U1.30 U1.31 U1.32 U1.34 U1.35 U1.39 U1.40 U1.41 U1.46 U1.47 U1.48 U5.4 U6.3 U6.4 U6.5 U6.6 U6.7 U6.8 U6.11 U6.12 U6.13 U6.14 U6.18 U6.19 U6.20 U6.21 U6.23 U6.25 U6.26 U6.27 U6.28

## Polygon pours and split planes (outlines as drawn)
GND on B.Cu "B.Cu-GND" (solid, pour order 0): 204,3.45 151,3.45 151,67.45 204,67.45

## Keep-outs
Edge.Cuts:
  lines w0.05: 150,2.45 150,68.45 ; 150,2.45 205,2.45 ; 150,2.45 150,68.45 ; 150,2.45 205,2.45 ; 150,68.45 205,68.45 ; 150,68.45 205,68.45 ; 205,2.45 205,68.45 ; 205,2.45 205,68.45

## Silkscreen, mask and mechanical layers (free items; w line width, h text height)
B.SilkS:
  text "WildEDS v1.00" at 201.978,64.776 h1
  text "Joss Chandler / Baldeep Pannu" at 202.22,60.454 h1
  text "Western Washinton University" at 202.122,58.21 h1